# Altium PCB Player.PcbDoc (part 2 of 6)
Units mil, origin at the board's own origin, x right, y up, seen from the top; angles counter-clockwise.
Board outline 2992.13 x 3937.01 mil, 6 copper layers (Top Layer, Mid-Layer 1, Mid-Layer 2, Mid-Layer 3, Mid-Layer 4, Bottom Layer), stack 60.567 mil thick; 284 components, 323 nets, 1590 pads, 1045 vias.
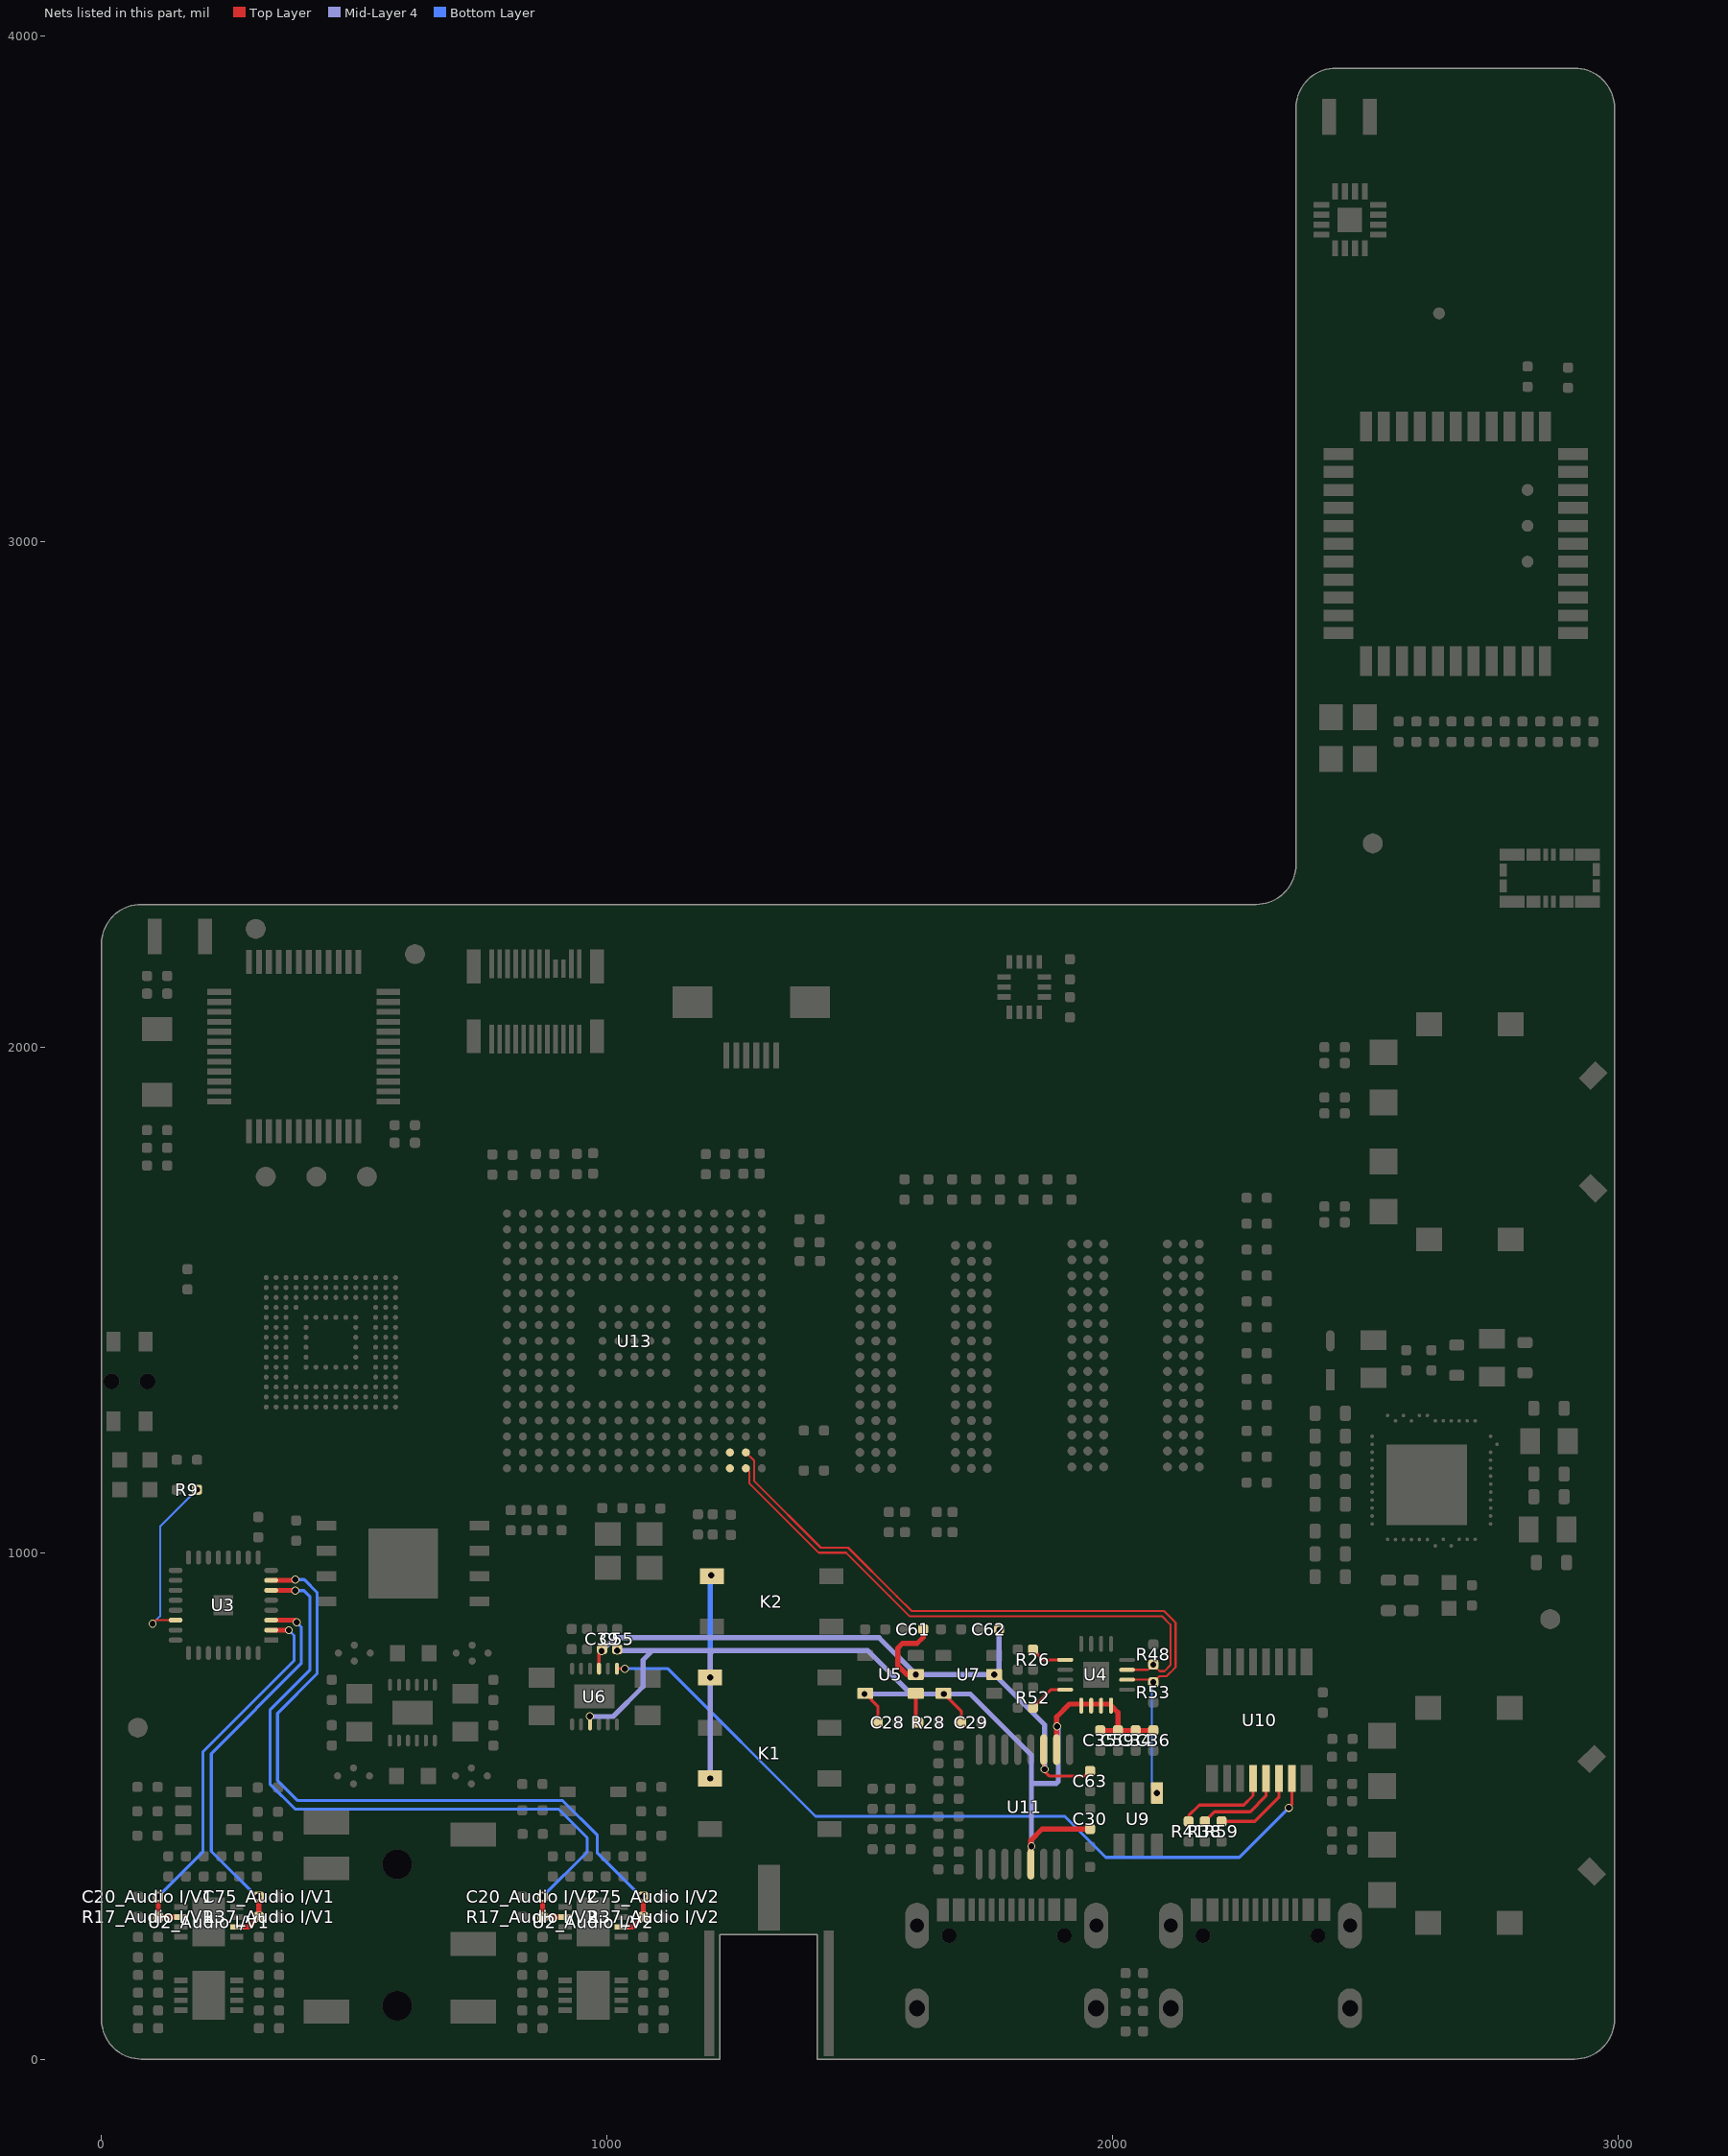
[diagram p6: the nets of this part, all layers, seen from the top]

## Footprints (in the part's own frame and the unit in brackets; to place one, negate y for a bottom-side part, rotate by r counter-clockwise, add the part's x,y. Pads: shape width x height; smd on the part's side, far side on the other; paste and mask are expansions set on the pad) (continued)
FP-RSL0048A-MFG [mm]
  round 0.18 smd paste+0 mask+0: 1(-2.975,2.2) 2(-2.985,1.8) 3(-2.985,1.4) 4(-2.985,1) 5(-2.985,0.6) 6(-2.985,0.2) 7(-3.3,-0.2) 8(-2.975,-0.6) 9(-3.3,-1) 10(-2.975,-1.4) 11(-2.975,-1.8) 12(-2.975,-2.2) 13(-2.2,-2.975) 14(-1.8,-2.975) 15(-1.4,-2.985) 16(-1,-2.975) 17(-0.6,-2.985) 18(-0.2,-2.985) 19(0.2,-2.975) 20(0.6,-2.975) 21(1,-2.975) 22(1.4,-2.975) 23(1.8,-3.3) 24(2.2,-2.975) 25(2.975,-2.2) 26(2.975,-1.8) 27(2.975,-1.4) 28(2.975,-1) 29(2.985,-0.6) 30(2.975,-0.2) 31(3.25,0.2) 32(3.25,0.6) 33(2.975,1) 34(3.25,1.4) 35(2.975,1.8) 36(3.25,2.2) 37(2.2,2.975) 38(1.8,2.975) 39(1.4,2.975) 40(1,2.975) 41(0.6,2.975) 42(0.2,2.975) 43(-0.2,2.975) 44(-0.6,2.975) 45(-1,2.975) 46(-1.4,2.975) 47(-1.8,2.975) 48(-2.2,2.975)
  rect 4.05x4.05 smd paste-1000 mask+0: 49(-0.225,0.225)
  Top Layer region: 3.4,-0.3 2.65,-0.3 2.612,-0.292 2.579,-0.271 2.558,-0.238 2.55,-0.2 2.55,-0.2 2.558,-0.162 2.579,-0.129 2.612,-0.108 2.65,-0.1 2.65,-0.1 3.4,-0.1
  Top Layer region: 0.7,3.4 0.7,2.65 0.687,2.6 0.65,2.563 0.6,2.55 0.6,2.55 0.562,2.558 0.529,2.579 0.508,2.612 0.5,2.65 0.5,2.65 0.5,3.4
  Top Layer region: -3.4,1.1 -2.65,1.1 -2.612,1.092 -2.579,1.071 -2.558,1.038 -2.55,1 -2.55,1 -2.563,0.95 -2.6,0.913 -2.65,0.9 -2.65,0.9 -3.4,0.9
  Top Layer region: -3.4,0.7 -2.65,0.7 -2.612,0.692 -2.579,0.671 -2.558,0.638 -2.55,0.6 -2.55,0.6 -2.563,0.55 -2.6,0.513 -2.65,0.5 -2.65,0.5 -3.4,0.5
  Top Layer region: -3.4,0.3 -2.65,0.3 -2.612,0.292 -2.579,0.271 -2.558,0.238 -2.55,0.2 -2.55,0.2 -2.563,0.15 -2.6,0.113 -2.65,0.1 -2.65,0.1 -3.4,0.1
  Top Layer region: -3.4,-1.7 -2.65,-1.7 -2.612,-1.708 -2.579,-1.729 -2.558,-1.762 -2.55,-1.8 -2.55,-1.8 -2.563,-1.85 -2.6,-1.887 -2.65,-1.9 -2.65,-1.9 -3.4,-1.9
  Top Layer region: -3.4,-1.3 -2.65,-1.3 -2.612,-1.308 -2.579,-1.329 -2.558,-1.362 -2.55,-1.4 -2.55,-1.4 -2.563,-1.45 -2.6,-1.487 -2.65,-1.5 -2.65,-1.5 -3.4,-1.5
  Top Layer region: -3.4,-2.1 -2.65,-2.1 -2.612,-2.108 -2.579,-2.129 -2.558,-2.162 -2.55,-2.2 -2.55,-2.2 -2.563,-2.25 -2.6,-2.287 -2.65,-2.3 -2.65,-2.3 -3.4,-2.3
  Top Layer region: -2.1,3.4 -2.1,2.65 -2.113,2.6 -2.15,2.563 -2.2,2.55 -2.2,2.55 -2.238,2.558 -2.271,2.579 -2.292,2.612 -2.3,2.65 -2.3,2.65 -2.3,3.4
  Top Layer region: -1.7,3.4 -1.7,2.65 -1.708,2.612 -1.729,2.579 -1.762,2.558 -1.8,2.55 -1.8,2.55 -1.838,2.558 -1.871,2.579 -1.892,2.612 -1.9,2.65 -1.9,2.65 -1.9,3.4
  Top Layer region: -1.3,3.4 -1.3,2.65 -1.313,2.6 -1.35,2.563 -1.4,2.55 -1.4,2.55 -1.438,2.558 -1.471,2.579 -1.492,2.612 -1.5,2.65 -1.5,2.65 -1.5,3.4
  Top Layer region: -0.9,3.4 -0.9,2.65 -0.913,2.6 -0.95,2.563 -1,2.55 -1,2.55 -1.038,2.558 -1.071,2.579 -1.092,2.612 -1.1,2.65 -1.1,2.65 -1.1,3.4
  Top Layer region: -0.5,3.4 -0.5,2.65 -0.513,2.6 -0.55,2.563 -0.6,2.55 -0.6,2.55 -0.638,2.558 -0.671,2.579 -0.692,2.612 -0.7,2.65 -0.7,2.65 -0.7,3.4
  Top Layer region: -0.1,3.4 -0.1,2.65 -0.113,2.6 -0.15,2.563 -0.2,2.55 -0.2,2.55 -0.238,2.558 -0.271,2.579 -0.292,2.612 -0.3,2.65 -0.3,2.65 -0.3,3.4
  Top Layer region: 1.1,3.4 1.1,2.65 1.087,2.6 1.05,2.563 1,2.55 1,2.55 0.962,2.558 0.929,2.579 0.908,2.612 0.9,2.65 0.9,2.65 0.9,3.4
  Top Layer region: 1.9,3.4 1.9,2.65 1.892,2.612 1.871,2.579 1.838,2.558 1.8,2.55 1.8,2.55 1.762,2.558 1.729,2.579 1.708,2.612 1.7,2.65 1.7,2.65 1.7,3.4
  Top Layer region: 2.3,3.4 2.3,2.65 2.287,2.6 2.25,2.563 2.2,2.55 2.2,2.55 2.162,2.558 2.129,2.579 2.108,2.612 2.1,2.65 2.1,2.65 2.1,3.4
  Top Layer region: 3.4,2.1 2.65,2.1 2.612,2.108 2.579,2.129 2.558,2.162 2.55,2.2 2.55,2.2 2.558,2.238 2.579,2.271 2.612,2.292 2.65,2.3 2.65,2.3 3.4,2.3
  Top Layer region: 3.4,1.7 2.65,1.7 2.612,1.708 2.579,1.729 2.558,1.762 2.55,1.8 2.55,1.8 2.558,1.838 2.579,1.871 2.612,1.892 2.65,1.9 2.65,1.9 3.4,1.9
  Top Layer region: 3.4,1.3 2.65,1.3 2.612,1.308 2.579,1.329 2.558,1.362 2.55,1.4 2.55,1.4 2.558,1.438 2.579,1.471 2.612,1.492 2.65,1.5 2.65,1.5 3.4,1.5
  Top Layer region: 3.4,0.9 2.65,0.9 2.612,0.908 2.579,0.929 2.558,0.962 2.55,1 2.55,1 2.558,1.038 2.579,1.071 2.612,1.092 2.65,1.1 2.65,1.1 3.4,1.1
  Top Layer region: 3.4,0.1 2.65,0.1 2.612,0.108 2.579,0.129 2.558,0.162 2.55,0.2 2.55,0.2 2.558,0.238 2.579,0.271 2.612,0.292 2.65,0.3 2.65,0.3 3.4,0.3
  Top Layer region: 3.4,-0.7 2.65,-0.7 2.612,-0.692 2.579,-0.671 2.558,-0.638 2.55,-0.6 2.55,-0.6 2.558,-0.562 2.579,-0.529 2.612,-0.508 2.65,-0.5 2.65,-0.5 3.4,-0.5
  Top Layer region: 3.4,-1.1 2.65,-1.1 2.612,-1.092 2.579,-1.071 2.558,-1.038 2.55,-1 2.55,-1 2.558,-0.962 2.579,-0.929 2.612,-0.908 2.65,-0.9 2.65,-0.9 3.4,-0.9
  Top Layer region: 3.4,-1.5 2.65,-1.5 2.612,-1.492 2.579,-1.471 2.558,-1.438 2.55,-1.4 2.55,-1.4 2.558,-1.362 2.579,-1.329 2.612,-1.308 2.65,-1.3 2.65,-1.3 3.4,-1.3
  Top Layer region: 3.4,-1.9 2.65,-1.9 2.612,-1.892 2.579,-1.871 2.558,-1.838 2.55,-1.8 2.55,-1.8 2.558,-1.762 2.579,-1.729 2.612,-1.708 2.65,-1.7 2.65,-1.7 3.4,-1.7
  Top Layer region: 3.4,-2.3 2.65,-2.3 2.612,-2.292 2.579,-2.271 2.558,-2.238 2.55,-2.2 2.55,-2.2 2.558,-2.162 2.579,-2.129 2.612,-2.108 2.65,-2.1 2.65,-2.1 3.4,-2.1
  Top Layer region: 2.1,-3.4 2.1,-2.65 2.108,-2.612 2.129,-2.579 2.162,-2.558 2.2,-2.55 2.2,-2.55 2.238,-2.558 2.271,-2.579 2.292,-2.612 2.3,-2.65 2.3,-2.65 2.3,-3.4
  Top Layer region: 1.7,-3.4 1.7,-2.65 1.708,-2.612 1.729,-2.579 1.762,-2.558 1.8,-2.55 1.8,-2.55 1.838,-2.558 1.871,-2.579 1.892,-2.612 1.9,-2.65 1.9,-2.65 1.9,-3.4
  Top Layer region: 0.5,-3.4 0.5,-2.65 0.508,-2.612 0.529,-2.579 0.562,-2.558 0.6,-2.55 0.6,-2.55 0.638,-2.558 0.671,-2.579 0.692,-2.612 0.7,-2.65 0.7,-2.65 0.7,-3.4
  Top Layer region: 0.1,-3.4 0.1,-2.65 0.108,-2.612 0.129,-2.579 0.162,-2.558 0.2,-2.55 0.2,-2.55 0.238,-2.558 0.271,-2.579 0.292,-2.612 0.3,-2.65 0.3,-2.65 0.3,-3.4
  Top Layer region: -0.3,-3.4 -0.3,-2.65 -0.292,-2.612 -0.271,-2.579 -0.238,-2.558 -0.2,-2.55 -0.2,-2.55 -0.162,-2.558 -0.129,-2.579 -0.108,-2.612 -0.1,-2.65 -0.1,-2.65 -0.1,-3.4
  Top Layer region: -0.7,-3.4 -0.7,-2.65 -0.692,-2.612 -0.671,-2.579 -0.638,-2.558 -0.6,-2.55 -0.6,-2.55 -0.562,-2.558 -0.529,-2.579 -0.508,-2.612 -0.5,-2.65 -0.5,-2.65 -0.5,-3.4
  Top Layer region: -1.1,-3.4 -1.1,-2.65 -1.092,-2.612 -1.071,-2.579 -1.038,-2.558 -1,-2.55 -1,-2.55 -0.962,-2.558 -0.929,-2.579 -0.908,-2.612 -0.9,-2.65 -0.9,-2.65 -0.9,-3.4
  Top Layer region: -1.5,-3.4 -1.5,-2.65 -1.492,-2.612 -1.471,-2.579 -1.438,-2.558 -1.4,-2.55 -1.4,-2.55 -1.362,-2.558 -1.329,-2.579 -1.308,-2.612 -1.3,-2.65 -1.3,-2.65 -1.3,-3.4
  Top Layer region: -1.9,-3.4 -1.9,-2.65 -1.892,-2.612 -1.871,-2.579 -1.838,-2.558 -1.8,-2.55 -1.8,-2.55 -1.762,-2.558 -1.729,-2.579 -1.708,-2.612 -1.7,-2.65 -1.7,-2.65 -1.7,-3.4
  Top Layer region: -2.3,-3.4 -2.3,-2.65 -2.292,-2.612 -2.271,-2.579 -2.238,-2.558 -2.2,-2.55 -2.2,-2.55 -2.162,-2.558 -2.129,-2.579 -2.108,-2.612 -2.1,-2.65 -2.1,-2.65 -2.1,-3.4
  Top Layer region: -3.4,-0.9 -2.65,-0.9 -2.612,-0.908 -2.579,-0.929 -2.558,-0.962 -2.55,-1 -2.55,-1 -2.558,-1.038 -2.579,-1.071 -2.612,-1.092 -2.65,-1.1 -2.65,-1.1 -3.4,-1.1
  Top Layer region: -3.4,1.5 -2.65,1.5 -2.612,1.492 -2.579,1.471 -2.558,1.438 -2.55,1.4 -2.55,1.4 -2.563,1.35 -2.6,1.313 -2.65,1.3 -2.65,1.3 -3.4,1.3
  Top Layer region: -3.4,2.3 -2.65,2.3 -2.612,2.292 -2.579,2.271 -2.558,2.238 -2.55,2.2 -2.55,2.2 -2.563,2.15 -2.6,2.113 -2.65,2.1 -2.65,2.1 -3.4,2.1
  Top Layer region: 0.3,3.4 0.3,2.65 0.287,2.6 0.25,2.563 0.2,2.55 0.2,2.55 0.162,2.558 0.129,2.579 0.108,2.612 0.1,2.65 0.1,2.65 0.1,3.4
  Top Layer region: 1.5,3.4 1.5,2.65 1.487,2.6 1.45,2.563 1.4,2.55 1.4,2.55 1.362,2.558 1.329,2.579 1.308,2.612 1.3,2.65 1.3,2.65 1.3,3.4
  Top Layer region: -3.4,1.9 -2.65,1.9 -2.612,1.892 -2.579,1.871 -2.558,1.838 -2.55,1.8 -2.55,1.8 -2.563,1.75 -2.6,1.713 -2.65,1.7 -2.65,1.7 -3.4,1.7
  Top Layer region: -3.4,-0.1 -2.65,-0.1 -2.612,-0.108 -2.579,-0.129 -2.558,-0.162 -2.55,-0.2 -2.55,-0.2 -2.563,-0.25 -2.6,-0.287 -2.65,-0.3 -2.65,-0.3 -3.4,-0.3
  Top Layer region: -3.4,-0.5 -2.65,-0.5 -2.612,-0.508 -2.579,-0.529 -2.558,-0.562 -2.55,-0.6 -2.55,-0.6 -2.563,-0.65 -2.6,-0.687 -2.65,-0.7 -2.65,-0.7 -3.4,-0.7
  Top Layer region: 3.4,0.5 2.65,0.5 2.612,0.508 2.579,0.529 2.558,0.562 2.55,0.6 2.55,0.6 2.558,0.638 2.579,0.671 2.612,0.692 2.65,0.7 2.65,0.7 3.4,0.7
  Top Layer region: 0.9,-3.4 0.9,-2.65 0.908,-2.612 0.929,-2.579 0.962,-2.558 1,-2.55 1,-2.55 1.038,-2.558 1.071,-2.579 1.092,-2.612 1.1,-2.65 1.1,-2.65 1.1,-3.4
  Top Layer region: 1.3,-3.4 1.3,-2.65 1.308,-2.612 1.329,-2.579 1.362,-2.558 1.4,-2.55 1.4,-2.55 1.438,-2.558 1.471,-2.579 1.492,-2.612 1.5,-2.65 1.5,-2.65 1.5,-3.4
  silkscreen extent -4.1,-3.07 3.08,3.08, body extent -3.5,-3.5 3.5,3.5, height 0.25
FP-SOD-323-IPC_C [mil]
  rect 41.54x17.16 smd paste+0 mask+0: 1(-38.41,0)
  rrect100% 41.54x17.16 smd paste+0 mask+0: 2(38.41,0)
  silkscreen extent -57,-26 33,33, body extent -63,-29 63,29, height 10
FP-SOT403-1-MFG [mm]
  rect 1.35x0.6 smd paste-1000 mask+0: 1(-2.925,2.375) 8(-2.925,-2.375) 9(2.925,-2.375) 16(2.925,2.375)
  rect 1.35x0.4 smd paste-1000 mask+0: 2(-2.925,1.625) 3(-2.925,0.975) 4(-2.925,0.325) 5(-2.925,-0.325) 6(-2.925,-0.975) 7(-2.925,-1.625) 10(2.925,-1.625) 11(2.925,-0.975) 12(2.925,-0.325) 13(2.925,0.325) 14(2.925,0.975) 15(2.925,1.625)
  silkscreen extent -4.3,-2.55 1.88,2.55, body extent -3.73,-2.9 3.72,2.9, height 0.25
FP-T1633-4-MFG [mm]
  rect 0.8x0.3 smd paste+0 mask+0: 1(-1.425,0.75) 2(-1.425,0.25) 3(-1.425,-0.25) 4(-1.425,-0.75) 9(1.425,-0.75) 10(1.425,-0.25) 11(1.425,0.25) 12(1.425,0.75)
  rect 0.3x0.8 smd paste+0 mask+0: 5(-0.75,-1.425) 6(-0.25,-1.425) 7(0.25,-1.425) 8(0.75,-1.425) 13(0.75,1.425) 14(0.25,1.425) 15(-0.25,1.425) 16(-0.75,1.425)
  rect 1.23x1.23 smd paste+0 mask+0: 17(0,0)
  silkscreen extent -2.52,-1.58 1.58,1.58, body extent -1.92,-1.92 1.93,1.92, height 0.25
FP-TFBGA240+25-A07U-MFG [mil]
  round 16 smd: A1(-251.97,251.97) A2(-220.47,251.97) A3(-188.98,251.97) A4(-157.48,251.97) A5(-125.98,251.97) A6(-94.49,251.97) A7(-62.99,251.97) A8(-31.5,251.97) A9(0,251.97) A10(31.5,251.97) A11(62.99,251.97) A12(94.49,251.97) A13(125.98,251.97) A14(157.48,251.97) A15(188.98,251.97) A16(220.47,251.97) A17(251.97,251.97) B1(-251.97,220.47) B2(-220.47,220.47) B3(-188.98,220.47) B4(-157.48,220.47) B5(-125.98,220.47) B6(-94.49,220.47) B7(-62.99,220.47) B8(-31.5,220.47) B9(0,220.47) B10(31.5,220.47) B11(62.99,220.47) B12(94.49,220.47) B13(125.98,220.47) B14(157.48,220.47) B15(188.98,220.47) B16(220.47,220.47) B17(251.97,220.47) C1(-251.97,188.98) C2(-220.47,188.98) C3(-188.98,188.98) C4(-157.48,188.98) C5(-125.98,188.98) C6(-94.49,188.98) C7(-62.99,188.98) C8(-31.5,188.98) C9(0,188.98) C10(31.5,188.98) C11(62.99,188.98) C12(94.49,188.98) C13(125.98,188.98) C14(157.48,188.98) C15(188.98,188.98) C16(220.47,188.98) C17(251.97,188.98) D1(-251.97,157.48) D2(-220.47,157.48) D3(-188.98,157.48) D4(-157.48,157.48) D5(-125.98,157.48) D6(-94.49,157.48) D7(-62.99,157.48) D8(-31.5,157.48) D9(0,157.48) D10(31.5,157.48) D11(62.99,157.48) D12(94.49,157.48) D13(125.98,157.48) D14(157.48,157.48) D15(188.98,157.48) D16(220.47,157.48) D17(251.97,157.48) E1(-251.97,125.98) E2(-220.47,125.98) E3(-188.98,125.98) E4(-157.48,125.98) E5(-125.98,125.98) E6(-94.49,125.98) E7(-62.99,125.98) E8(-31.5,125.98) E9(0,125.98) E10(31.5,125.98) E11(62.99,125.98) E12(94.49,125.98) E13(125.98,125.98) E14(157.48,125.98) E15(188.98,125.98) E16(220.47,125.98) E17(251.97,125.98) F1(-251.97,94.49) F2(-220.47,94.49) F3(-188.98,94.49) F4(-157.48,94.49) F5(-125.98,94.49) F13(125.98,94.49) F14(157.48,94.49) F15(188.98,94.49) F16(220.47,94.49) F17(251.97,94.49) G1(-251.97,62.99) G2(-220.47,62.99) G3(-188.98,62.99) G4(-157.48,62.99) G5(-125.98,62.99) G7(-62.99,62.99) G8(-31.5,62.99) G9(0,62.99) G10(31.5,62.99) G11(62.99,62.99) G13(125.98,62.99) G14(157.48,62.99) G15(188.98,62.99) G16(220.47,62.99) G17(251.97,62.99) H1(-251.97,31.5) H2(-220.47,31.5) H3(-188.98,31.5) H4(-157.48,31.5) H5(-125.98,31.5) H7(-62.99,31.5) H8(-31.5,31.5) H9(0,31.5) H10(31.5,31.5) H11(62.99,31.5) H13(125.98,31.5) H14(157.48,31.5) H15(188.98,31.5) H16(220.47,31.5) H17(251.97,31.5) J1(-251.97,0) J2(-220.47,0) J3(-188.98,0) J4(-157.48,0) J5(-125.98,0) J7(-62.99,0) J8(-31.5,0) J9(0,0) J10(31.5,0) J11(62.99,0) J13(125.98,0) J14(157.48,0) J15(188.98,0) J16(220.47,0) J17(251.97,0) K1(-251.97,-31.5) K2(-220.47,-31.5) K3(-188.98,-31.5) K4(-157.48,-31.5) K5(-125.98,-31.5) K7(-62.99,-31.5) K8(-31.5,-31.5) K9(0,-31.5) K10(31.5,-31.5) K11(62.99,-31.5) K13(125.98,-31.5) K14(157.48,-31.5) K15(188.98,-31.5) K16(220.47,-31.5) K17(251.97,-31.5) L1(-251.97,-62.99) L2(-220.47,-62.99) L3(-188.98,-62.99) L4(-157.48,-62.99) L5(-125.98,-62.99) L7(-62.99,-62.99) L8(-31.5,-62.99) L9(0,-62.99) L10(31.5,-62.99) L11(62.99,-62.99) L13(125.98,-62.99) L14(157.48,-62.99) L15(188.98,-62.99) L16(220.47,-62.99) L17(251.97,-62.99) M1(-251.97,-94.49) M2(-220.47,-94.49) M3(-188.98,-94.49) M4(-157.48,-94.49) M5(-125.98,-94.49) M13(125.98,-94.49) M14(157.48,-94.49) M15(188.98,-94.49) M16(220.47,-94.49) M17(251.97,-94.49) N1(-251.97,-125.98) N2(-220.47,-125.98) N3(-188.98,-125.98) N4(-157.48,-125.98) N5(-125.98,-125.98) N6(-94.49,-125.98) N7(-62.99,-125.98) N8(-31.5,-125.98) N9(0,-125.98) N10(31.5,-125.98) N11(62.99,-125.98) N12(94.49,-125.98) N13(125.98,-125.98) N14(157.48,-125.98) N15(188.98,-125.98) N16(220.47,-125.98) N17(251.97,-125.98) P1(-251.97,-157.48) P2(-220.47,-157.48) P3(-188.98,-157.48) P4(-157.48,-157.48) P5(-125.98,-157.48) P6(-94.49,-157.48) P7(-62.99,-157.48) P8(-31.5,-157.48) P9(0,-157.48) P10(31.5,-157.48) P11(62.99,-157.48) P12(94.49,-157.48) P13(125.98,-157.48) P14(157.48,-157.48) P15(188.98,-157.48) P16(220.47,-157.48) P17(251.97,-157.48) R1(-251.97,-188.98) R2(-220.47,-188.98) R3(-188.98,-188.98) R4(-157.48,-188.98) R5(-125.98,-188.98) R6(-94.49,-188.98) R7(-62.99,-188.98) R8(-31.5,-188.98) R9(0,-188.98) R10(31.5,-188.98) R11(62.99,-188.98) R12(94.49,-188.98) R13(125.98,-188.98) R14(157.48,-188.98) R15(188.98,-188.98) R16(220.47,-188.98) R17(251.97,-188.98) T1(-251.97,-220.47) T2(-220.47,-220.47) T3(-188.98,-220.47) T4(-157.48,-220.47) T5(-125.98,-220.47) T6(-94.49,-220.47) T7(-62.99,-220.47) T8(-31.5,-220.47) T9(0,-220.47) T10(31.5,-220.47) T11(62.99,-220.47) T12(94.49,-220.47) T13(125.98,-220.47) T14(157.48,-220.47) T15(188.98,-220.47) T16(220.47,-220.47) T17(251.97,-220.47) U1(-251.97,-251.97) U2(-220.47,-251.97) U3(-188.98,-251.97) U4(-157.48,-251.97) U5(-125.98,-251.97) U6(-94.49,-251.97) U7(-62.99,-251.97) U8(-31.5,-251.97) U9(0,-251.97) U10(31.5,-251.97) U11(62.99,-251.97) U12(94.49,-251.97) U13(125.98,-251.97) U14(157.48,-251.97) U15(188.98,-251.97) U16(220.47,-251.97) U17(251.97,-251.97)
  silkscreen extent -298,-279 279,279, body extent -298,-298 298,298, height 10
FPC-SMD_P0.50-6P_AFC01-S06FCA-00 [mm]
  rect 0.3x1.3 smd: 1(-1.248,1.339) 2(-0.748,1.339) 3(-0.248,1.339) 4(0.252,1.339) 5(0.752,1.339) 6(1.252,1.339)
  rect 2x1.6 smd: 7(-2.95,-1.339) 8(2.95,-1.339)
  silkscreen extent -3.72,-4.36 3.7,1.75, body extent -3.7,-4.49 3.7,1.61, height 2.01
L0603 [mil]
  rect 29.5x32 smd: 1(-31.5,0) 2(31.5,0)
  silkscreen extent -55,-25 55,25, body extent -31,-15 32,16, height 16
L0805 [mm] "0805贴片叠层电感"
  rect 1x1.3 smd: 1(-0.95,0) 2(0.95,0)
  silkscreen extent -1.7,-0.89 1.7,0.89, body extent -1,-0.65 1,0.65, height 1.3
LED0603_B [mil] "蓝色0603LED"
  rect 30x30 smd: 1(-30,0) 2(30,0)
  silkscreen extent -53,-23 61,23, body extent -31,-16 32,16, height 18
LGA-14_L3.0-W2.5-P0.50-TL [mm]
  rect 0.675x0.28 smd: 1(-1.262,0.75) 2(-1.262,0.25) 3(-1.262,-0.25) 4(-1.262,-0.75) 8(1.262,-0.75) 9(1.262,-0.25) 10(1.262,0.25) 11(1.262,0.75)
  rect 0.28x0.675 smd: 5(-0.5,-1.012) 6(0,-1.012) 7(0.5,-1.012) 12(0.5,1.012) 13(0,1.012) 14(-0.5,1.012)
  silkscreen extent -1.98,-1.33 1.58,1.33, body extent -1.5,-1.25 1.5,1.25, height 0.92
"Mark 1" [mm] "光学定位点，直径1mm"
  round 1 smd paste-1 mask+0.7: Mark(0,0)
  Keep-Out Layer circle w0.1: c0,0 r1.5
OK-06F024-04 [mm]
  rect 0.23x1.45 smd: 1(-2.224,-1.876) 2(-1.824,-1.876) 3(-1.424,-1.876) 4(-1.024,-1.876) 5(-0.624,-1.876) 6(-0.224,-1.876) 7(0.176,-1.876) 8(0.576,-1.876) 9(0.976,-1.876) 10(1.376,-1.876) 11(1.776,-1.876) 12(2.176,-1.876) 13(2.176,1.912) 14(1.776,1.912) 17(0.576,1.912) 18(0.176,1.912) 19(-0.224,1.912) 20(-0.624,1.912) 21(-1.024,1.912) 22(-1.424,1.912) 23(-1.824,1.912) 24(-2.224,1.912)
  rect 0.23x0.92 smd: 15(1.376,1.658) 16(0.976,1.658)
  rect 0.7x1.7 smd: 25(-3.124,-1.736) 26(3.076,-1.736) 27(3.076,1.772) 28(-3.124,1.772)
  silkscreen extent -3.67,-2.88 3.62,2.32, body extent -3.51,-1.48 3.51,1.48, height 0.98
PJ342A [mm] "沉板式，有头"
  round 1.5 hole 1.5: 0(0,-4.4) 0(0,-11.5)
  rect 2.3x1.2 smd: 1(-3.81,-4.1) 2(3.556,-4.1) 3(-3.81,-7.5) 4(3.556,-11.3) 5(-3.81,-13) 6(3.556,-13.6)
  silkscreen extent -3.3,-14.22 3.3,0, body extent -4.2,-14.15 4.1,-0.05, height 4.75
"QFN32 5x5_L" [mm] "32脚，长x宽x高：5x5x0.95mm，脚距：0.5mm"
  rect 0.25x0.7 smd: 1(-1.751,-2.4)
  oval 0.25x0.7 smd: 2(-1.25,-2.4) 3(-0.75,-2.4) 4(-0.25,-2.4) 5(0.25,-2.4) 6(0.75,-2.4) 7(1.25,-2.4) 8(1.75,-2.4) 17(1.75,2.4) 18(1.25,2.4) 19(0.75,2.4) 20(0.25,2.4) 21(-0.25,2.4) 22(-0.75,2.4) 23(-1.25,2.4) 24(-1.75,2.4)
  oval 0.7x0.25 smd: 9(2.4,-1.75) 10(2.4,-1.25) 11(2.4,-0.75) 12(2.4,-0.25) 13(2.4,0.25) 14(2.4,0.75) 15(2.4,1.25) 16(2.4,1.75) 25(-2.4,1.75) 26(-2.4,1.25) 27(-2.4,0.75) 28(-2.4,0.25) 29(-2.4,-0.25) 30(-2.4,-0.75) 31(-2.4,-1.25) 32(-2.4,-1.75)
  rect 1x1 smd: 33(0,0)
  Top Layer region: -1.75,1.75 1.75,1.75 1.75,-1.75 -1.25,-1.75 -1.75,-1.25
  silkscreen extent -2.6,-3.13 2.6,2.6, body extent -2.5,-2.5 2.5,2.5, height 1.01
QFN-44_L12.0-W12.0-P0.90-TL [mm]
  rect 1.5x0.6 smd paste+0 mask+0.05: 1(-5.889,4.496) 2(-5.889,3.607) 3(-5.889,2.692) 4(-5.889,1.803) 5(-5.889,0.889) 6(-5.889,0) 7(-5.889,-0.889) 8(-5.889,-1.803) 9(-5.889,-2.692) 10(-5.889,-3.607) 11(-5.889,-4.496) 23(5.889,-4.496) 24(5.889,-3.607) 25(5.889,-2.692) 26(5.889,-1.803) 27(5.889,-0.889) 28(5.889,0) 29(5.889,0.889) 30(5.889,1.803) 31(5.889,2.692) 32(5.889,3.607) 33(5.889,4.496)
  rect 0.6x1.5 smd paste+0 mask+0.05: 12(-4.496,-5.889) 13(-3.607,-5.889) 14(-2.692,-5.889) 15(-1.803,-5.889) 16(-0.889,-5.889) 17(0,-5.889) 18(0.889,-5.889) 19(1.803,-5.889) 20(2.692,-5.889) 21(3.607,-5.889) 22(4.496,-5.889) 34(4.496,5.889) 35(3.607,5.889) 36(2.692,5.889) 37(1.803,5.889) 38(0.889,5.889) 39(0,5.889) 40(-0.889,5.889) 41(-1.803,5.889) 42(-2.692,5.889) 43(-3.607,5.889) 44(-4.496,5.889)
  round 0.6 smd paste+0 mask+0.05: 45(-2.7,3.607) 46(-0.9,3.607) 47(0.9,3.607)
  silkscreen extent -5.99,-5.99 5.99,5.99, body extent -6.01,-6.01 6.01,6.01, height 1.5
SMD_L2.2-W1.0_KH-221020-TP [mm]
  rect 1.8x0.7 smd paste+0 mask+0.05: 1(0,0)
  silkscreen extent -1.3,-0.5 1.2,0.51, body extent -1.1,-0.51 1.1,0.5, height 1.91
SW-SMD-3.5*3.0_4P [mm]
  round 0.8 hole 0.8 unplated mask+0: 0(0,0.9) 0(0,-0.9)
  rect 1x0.7 smd mask+0.051: 1(-2,0.8) 2(-2,-0.8) 3(2,-0.8) 4(2,0.8)
  silkscreen extent -1.75,-1.5 1.75,2.25, body extent -2.3,-1.51 2.3,2.24, height 1.33
SW-SMD_SIQ-02FVS3_1 [mm]
  rect 1.2x1.3 smd paste+0 mask+0.05: 1(5.4,-2.964) 2(5.4,1.136) 5(-5.4,1.136) 6(-5.4,-2.964)
  rect 0.85x1.2 smd rot 135 paste+0 mask+0.05: 3(2.828,5.264)
  rect 0.85x1.2 smd rot 45 paste+0 mask+0.05: 4(-2.828,5.264)
  rect 1.3x1.4 smd paste+0 mask+0.05: A(-4,-5.264) B(4,-5.264) C(1.475,-5.264) S(-1.475,-5.264)
  Keep-Out Layer board cut-out: 3.8,-2.064 3.8,-1.959 3.745,-1.755 3.64,-1.573 3.491,-1.424 3.309,-1.319 3.105,-1.264 2.895,-1.264 2.691,-1.319 2.509,-1.424 2.36,-1.573 2.254,-1.755 2.2,-1.959 2.2,-2.064 2.2,-2.17 2.254,-2.373 2.36,-2.555 2.509,-2.704 2.691,-2.81 2.895,-2.864 3.105,-2.864 3.309,-2.81 3.491,-2.704 3.64,-2.555 3.745,-2.373 3.8,-2.17 3.8,-2.064 3.8,-2.064
  Keep-Out Layer board cut-out: -2.2,-2.064 -2.2,-1.959 -2.255,-1.755 -2.36,-1.573 -2.509,-1.424 -2.691,-1.319 -2.895,-1.264 -3.105,-1.264 -3.309,-1.319 -3.491,-1.424 -3.64,-1.573 -3.746,-1.755 -3.8,-1.959 -3.8,-2.064 -3.8,-2.17 -3.746,-2.373 -3.64,-2.555 -3.491,-2.704 -3.309,-2.81 -3.105,-2.864 -2.895,-2.864 -2.691,-2.81 -2.509,-2.704 -2.36,-2.555 -2.255,-2.373 -2.2,-2.17 -2.2,-2.064 -2.2,-2.064
  Keep-Out Layer circle w0.025: c3,-2.064 r0.8
  Keep-Out Layer circle w0.254: c3,-2.064 r0.8
  Keep-Out Layer circle w0.025: c-3,-2.064 r0.8
  Keep-Out Layer circle w0.254: c-3,-2.064 r0.8
  silkscreen extent -7.25,-4.76 7.25,9.69, body extent -7.18,-5.15 7.21,9.64, height 4
"TEST 1" [mm] "测试点1mm"
  round 1 smd paste-1: 1(0,0)
USB-C-SMD_16P [mm] "封装库来自淘宝ID:黄晶宝石"
  oval 1.2x2.3 hole 0.7 slot 1.8 at 90 deg: 0(-4.5,-1.675) 0(4.5,-1.675)
  oval 1.2x2 hole 0.8 slot 1.6 at 90 deg: 0(-4.5,2.475) 0(4.5,2.475)
  rect 0.3x1.15 smd: A1(3.35,-2.473) A4(2.55,-2.471) A5(1.25,-2.475) A6(0.25,-2.475) A7(-0.25,-2.473) A9(-2.55,-2.475) A12(-3.35,-2.475) B1(-3.05,-2.475) B4(-2.25,-2.475) B5(-1.75,-2.475) B6(-0.75,-2.475) B7(0.75,-2.473) B9(2.25,-2.471) B12(3.05,-2.473)
  rect 0.3x1.148 smd: A8(1.75,-2.475) B8(-1.25,-2.475)
  round 0.75 hole 0.75 unplated: ""(-2.89,-1.175) ""(2.89,-1.175)
  silkscreen extent -4.56,-2.75 4.5,5.08, body extent -4.45,-2.87 4.49,5.03, height 3.25
WIFI-ANT [mm] "淘宝ID:黄晶宝石"
  round 0.6 smd: 1(0,0)
  Top Layer lines w0.6: 0,0 0,-7.8 1.2,-7.8 1.2,-4 2.4,-4 2.4,-7.8 3.6,-7.8 3.6,-4 4.8,-4 4.8,-7.8 6,-7.8 6,-4 7.2,-4 7.2,-7.8 11,-7.8 ; 0,-2.4 7.3,-2.4
WSON8 [mm]
  rect 3.5x3.5 smd: 0(0,0)
  rect 1x0.5 smd: 1(-3.845,1.905) 2(-3.845,0.635) 3(-3.845,-0.635) 4(-3.845,-1.905) 5(3.845,-1.905) 6(3.845,-0.635) 7(3.845,0.635) 8(3.845,1.905)
  silkscreen extent -4.18,-3.17 4.17,3.17, body extent -4.03,-3.03 4.02,3.03, height 0.8
XTAL-3215-2P [mm] "3.2*1.5*0.6mm(长宽高)"
  rect 1.2x1.5 smd: 1(-1.65,0) 2(1.65,0)
  silkscreen extent -2.41,-0.89 2.41,0.89, body extent -1.6,-0.75 1.6,0.75, height 0.61
XTAL-3225-4P [mm] "3.2*2.5*0.7mm(长宽高)                             淘宝ID:黄晶宝石"
  rect 1.3x1.2 smd: 1(-1.05,-0.85) 2(1.05,-0.85) 3(1.05,0.85) 4(-1.05,0.85)
  silkscreen extent -2.03,-1.75 1.91,1.65, body extent -1.6,-1.25 1.6,1.25, height 0.7

## Part data
ANT1: library part ANT1, "PCB板载天线", BOM名称=PCB板载天线, 当前库版本V2023.8.14 @淘宝卖家:黄晶宝石=最新版本发布https://item.taobao.com/item.htm?id=566775463719, 联系下单店铺卖家 免费技术支持="联系下单店铺卖家 免费帮你查找封装"
Audio: "3.5耳机插座,4Pin", BOM名称=耳机插座, 当前库版本V2023.8.14 @淘宝卖家:黄晶宝石=最新版本发布https://item.taobao.com/item.htm?id=566775463719
B1 B2: library part BEAD
"Battery Connector": library part BM25-4S/2-V-51, "Battery"
C1 "C1_HMI-Rotary Encoder1" "C1_HMI-Rotary Encoder2" C2 "C2_HMI-Rotary Encoder1" "C2_HMI-Rotary Encoder2" C3 "C3_HMI-Rotary Encoder1" "C3_HMI-Rotary Encoder2" C4 C5 C6 C7 C8 C9 C10 C11 C12 C13 C14 C15 C16 C16_U_SDRAM1 C16_U_SDRAM2 C17 C17_U_SDRAM1 C17_U_SDRAM2 C18 C18_U_SDRAM1 C18_U_SDRAM2 C19 C19_U_SDRAM1 C19_U_SDRAM2 "C20_Audio I/V1" "C20_Audio I/V2" C20_U_SDRAM1 C20_U_SDRAM2 C21 C21_U_SDRAM1 C21_U_SDRAM2 C22 C22_U_SDRAM1 C22_U_SDRAM2 C23 C23_U_SDRAM1 C23_U_SDRAM2 C24 C24_U_SDRAM1 C24_U_SDRAM2 C25 C25_U_SDRAM1 C25_U_SDRAM2 C26 C26_U_SDRAM1 C26_U_SDRAM2 C27 C27_U_SDRAM1 C27_U_SDRAM2 C28 C29 C30 C31 C33 C34 C35 C36 C37 C38 C39 "C40_Audio I/V1" "C40_Audio I/V2" C41 C42 C43 C44 C45 C46 C47 C48 C49 C50 C51 C52 "C53_Audio I/V1" "C53_Audio I/V2" C54 C55 C56 C57 C58 C59 C61 C62 C63 C64 C65 C66 C67 C68 C69 C70 C71 "C72_Audio I/V1" "C72_Audio I/V2" "C73_Audio I/V1" "C73_Audio I/V2" "C74_Audio I/V1" "C74_Audio I/V2" "C75_Audio I/V1" "C75_Audio I/V2" "C76_Audio I/V1" "C76_Audio I/V2" "C77_Audio I/V1" "C77_Audio I/V2" "C78_Audio I/V1" "C78_Audio I/V2" C79 C80 C81 C82 "C83_Audio I/V1" "C83_Audio I/V2" "C84_Audio I/V1" "C84_Audio I/V2" C95: library part 电容-0402, "Capacitor"
C32 C60: library part "CAP 240pF 250V C0G 0805", Manufacturer="Kyocera AVX", Manufacturer Part Number=600F241FT250XT, Package=0805, Supplier Part Number 1=581-600F241FT, Temperature Coefficient=C0G, Voltage Rating=250V, Supplier 1=Mouser
C86 C92 C93 C94: library part CMP-06053-000028-1, "CAP FEEDTHRU 1UF 20% 6.3V 0603", Capacitance=1uF, Case Code (Imperial)=0603, Case Code (Metric)=1608, Current=2A, DC Resistance (DCR)=30mR, Max Operating Temperature=125°C, Min Operating Temperature=-55°C, Package Quantity=4000, Tolerance=20%, Voltage Rating=6.3V, Case/Package=0603, Height=0.028inch, Length=0.063inch, Mount="Surface Mount", Packaging="Tape and Reel", Voltage Rating (DC)=6.3V, Width=0.031inch
D2: library part CMP-56206-000009-1, "DIODE SCHOTTKY 40V 1A SOD323", Average Rectified Current=1A, Forward Voltage=900mV, Max Operating Temperature=125°C, Max Reverse Leakage Current=1mA, Max Reverse Voltage (DC)=40V, Max Surge Current=10A, Min Operating Temperature=-65°C, Package Quantity=1, Element Configuration=Single, Lead Free="Lead Free", Mount="Surface Mount", Number of Pins=2, Packaging="Tape and Reel", Peak Non-Repetitive Surge Current=10A, Radiation Hardening=No, RoHS Compliant=Yes, Series=-
"Encode_HMI-Rotary Encoder1" "Encode_HMI-Rotary Encoder2": JLCPCB Part Class="Extended Part", LCSC Part Name=拨轮滚轮旋转编码器开关, Manufacturer=MITSUMI(美上美), Add into BOM=yes, Convert to PCB=yes, Datasheet=https://atta.szlcsc.com/upload/public/pdf/source/20220728/2FBC1A98A06DC86460FC69DAE20456FC.pdf, DEVICE=SIQ-02FVS3, Manufacturer Part=SIQ-02FVS3, Supplier=LCSC, Supplier Footprint=SMD, Supplier Part=C2925423, Symbol=SIQ-02FVS3
FPC2: JLCPCB Part Class=扩展库, LCSC Part Name="间距:0.5mm P数:6P 翻盖式 下接", Manufacturer=JS(钜硕电子), Add into BOM=yes, Contact Type=下接, Convert to PCB=yes, Datasheet=https://atta.szlcsc.com/upload/public/pdf/source/20190816/C413942_2A72D1AC756EAE17EEDF756A339D4500.pdf, DEVICE=AFC01-S06FCA-00, FFC, FCB Thickness=0.3mm, Height Above Board=2mm, Locking Feature=翻盖式, Manufacturer Part=AFC01-S06FCA-00, Mounting Type=卧贴, Number of Contacts=6P, Pitch=0.5mm, Supplier=LCSC, Supplier Footprint=SMD,P=0.5mm,卧贴, Supplier Part=C262655, Symbol=AFC01-S06FCA-00
J1: library part CMP-03913-103226999-1, "60612202111308 WR-MCX_MCX PCB End Launch Jack", Insulation Resistance=1GΩ, Max Operating Temperature=155°C, Min Operating Temperature=-55°C, Impedance=50Ω, Insertion Loss (dB)=0.25dB, Insulation Material=PTFE, NexarPartId=103226999, Packaging="Tape and Reel", RoHS=Compliant
K1: library part CMP-00287-06029784-1, "AQW212SX Mosfet Relay, Dpst-No, 0.4A, 60V, Sop-8 Rohs Compliant: Yes", Ambient Temperature Range High=85°C, Capacitance=800fF, Case/Package=SOP, Input Current=3mA, Isolation Voltage=1.5kV, Load Current=400mA, Max Junction Temperature (Tj)=125°C, Max Output Voltage=60V, Max Power Dissipation=650mW, Min Operating Temperature=-40°C, On-State Resistance=830mΩ, Output Voltage=48V, Resistance=2.5Ω, Height=2.3mm, Max Operating Temperature=85°C, Mount="Surface Mount", NexarPartId=6029784, Number of Contacts=2, Output Current=400mA, Packaging="Tape & Reel (TR)", Radiation Hardening=No, Relay Type=Relay, RoHS=Compliant, Termination="Gull Wing", Throw Configuration=DPST
K2: library part CMP-00287-00695292-1, "AQY212GSZ Relay Ssr 50MA 1.5V Dc-in 1A 60V Ac/dc-out 4-PIN Sop T/r", Ambient Temperature Range High=85°C, Capacitance=800fF, Case/Package=SOP, Forward Current=1.1mA, Input Current=30mA, Isolation Voltage=1.5kV, Load Current=1A, Max Input Current=50mA, Max Input Voltage=1.5V, Max Output Voltage=60V, Max Power Dissipation=450mW, Min Operating Temperature=-40°C, On-State Resistance=340mΩ, Output Voltage=48V, Resistance=700mΩ, Height=2.1mm, Lead Free="Lead Free", Length=4.4mm, Max Operating Temperature=85°C, Max Output Current=1A, Mount="Surface Mount", NexarPartId=695292, Number of Contacts=1, Number of Pins=4, Output Current=1A, Packaging="Tape & Reel (TR)", Radiation Hardening=No, REACH SVHC="No SVHC", Relay Type=Relay, RoHS=Compliant, Termination="Gull Wing", Throw Configuration=SPST, Width=4.3mm
L1 L2 L3 L4 L5 L6 L7 L8: library part L, "贴片小功率电感", BOM名称=小功率贴片电感, 联系下单店铺卖家 免费帮你查找封装="联系下单店铺卖家 免费技术支持"
LED1 LED2: library part LED-SMD, "贴片LED", BOM名称=贴片LED, 联系卖家 免费查找封装=封装库来自淘宝卖家ID：黄晶宝石
MR1 MR2 MR3 MR4: library part MARK, "光学定位点", BOM名称=光学定位点, 联系下单店铺卖家 免费技术支持="联系下单店铺卖家 免费帮你查找封装"
R1 R2 R3 R4 R5 R6 R7 R8 R9 R10 R11 R12 "R12_HMI-Rotary Encoder1" "R12_HMI-Rotary Encoder2" R13 "R13_HMI-Rotary Encoder1" "R13_HMI-Rotary Encoder2" R14 R15 "R15_HMI-Rotary Encoder1" "R15_HMI-Rotary Encoder2" R16 "R17_Audio I/V1" "R17_Audio I/V2" R18 "R19_Audio I/V1" "R19_Audio I/V2" "R20_Audio I/V1" "R20_Audio I/V2" R21 R22 R23 "R24_Audio I/V1" "R24_Audio I/V2" "R25_Audio I/V1" "R25_Audio I/V2" R26 "R27_Audio I/V1" "R27_Audio I/V2" R28 R29 R30 R31 R32 R33 "R34_Audio I/V1" "R34_Audio I/V2" R35 "R36_Audio I/V1" "R36_Audio I/V2" "R37_Audio I/V1" "R37_Audio I/V2" R38 R40 R41 R42 R43 R44 R45 R46 R47 R48 R49 R50 R51 R52 R53 R54 "R55_Audio I/V1" "R55_Audio I/V2" "R56_Audio I/V1" "R56_Audio I/V2" "R57_Audio I/V1" "R57_Audio I/V2" R59 "R60_Audio I/V1" "R60_Audio I/V2" "R61_Audio I/V1" "R61_Audio I/V2" "R63_Audio I/V1" "R63_Audio I/V2" "R65_Audio I/V1" "R65_Audio I/V2": library part R, "贴片电阻", BOM名称=贴片电阻
  R1 R2 R3 R4 R5 R6 R7 R8 R9 R10 R11 R12 R13 R14 R15 R16 R18 R21 R22 R23 R26 R28 R29 R30 R31 R32 R33 R35 R38 R40 R41 R42 R43 R44 R45 R46 R47 R48 R49 R50 R51 R52 R53 R54 R59: 联系卖家，免费查找封装=唯一出售店铺网址https://shop463601444.taobao.com
  "R12_HMI-Rotary Encoder1" "R12_HMI-Rotary Encoder2" "R13_HMI-Rotary Encoder1" "R13_HMI-Rotary Encoder2" "R15_HMI-Rotary Encoder1" "R15_HMI-Rotary Encoder2" "R17_Audio I/V1" "R17_Audio I/V2" "R19_Audio I/V1" "R19_Audio I/V2" "R20_Audio I/V1" "R20_Audio I/V2" "R24_Audio I/V1" "R24_Audio I/V2" "R25_Audio I/V1" "R25_Audio I/V2" "R27_Audio I/V1" "R27_Audio I/V2" "R34_Audio I/V1" "R34_Audio I/V2" "R36_Audio I/V1" "R36_Audio I/V2" "R37_Audio I/V1" "R37_Audio I/V2" "R55_Audio I/V1" "R55_Audio I/V2" "R56_Audio I/V1" "R56_Audio I/V2" "R57_Audio I/V1" "R57_Audio I/V2" "R60_Audio I/V1" "R60_Audio I/V2" "R61_Audio I/V1" "R61_Audio I/V2" "R63_Audio I/V1" "R63_Audio I/V2" "R65_Audio I/V1" "R65_Audio I/V2": 联系下单店铺卖家 免费帮你查找封装="联系下单店铺卖家 免费技术支持"
R39 R58 R62 R64: library part "RES 20K OHM 1% 1/16W 0402", Manufacturer=Yageo, Manufacturer Part Number=RC0402FR-0720KL, Package=0402, Supplier Part Number 1=603-RC0402FR-0720KL, Tolerance=1%, Supplier 1=Mouser
SPK+ SPK- TP2 TP3 TP4 TP5 TP6 TP7: library part TEST, "测试点", BOM名称=测试点, 联系下单店铺卖家 免费技术支持="联系下单店铺卖家 免费帮你查找封装"
SW1: "小乌龟-侧按4脚开关 带定位柱", 联系下单店铺卖家 免费技术支持="联系下单店铺卖家 免费帮你查找封装"
U1: "Micron Serial NOR Flash Memory, 2.7 to 3.6 V, 256 Mb, -40 to 85 degC, 8-Pin W-PDFN (W9), RoHS", Manufacturer="Micron Technology", Package Description="8-Pin Plastic Dual Flat No-lead Package, Body 8 x 6 mm, Pitch 1.27 mm", Package Reference=W9, Datasheet URL=https://www.micron.com/~/media/documents/products/data-sheet/nor-flash/serial-nor/mt25q/die-rev-a/mt25q_qljs_l_256_aba_0.pdf, Datasheet Version="Rev. I, 07/2017", Manufacturer Part Number=MT25QL256ABA1EW9-0SIT, Manufacturer URL=http://www.micron.com/, Mounting Technology=SurfaceMount, RoHSCompliant=true
"U2_Audio I/V1" "U2_Audio I/V2" "U16_Audio I/V1" "U16_Audio I/V2": "Double Channel Low Power Operational Amplifier, 145 MHz BW, 180 V/us SR, Industrial, 8-pin SOIC (R-8), Reel", Amplifiers Per Package=2, Generic Part Number=AD8066, Input Bias Current=2pA, Input Offset Voltage=400uV, Manufacturer="Analog Devices", Code_JEDEC=MS-012-AA, ComponentLink1Description="Manufacturer URL", ComponentLink1URL=http://www.analog.com/en/index.html, ComponentLink2Description=Datasheet, ComponentLink2URL=http://www.analog.com/static/imported-files/data_sheets/AD8065_8066.pdf, ComponentLink3Description="Package Specification", ComponentLink3URL=http://www.analog.com/static/imported-files/packages/PKG_PDF/SOIC_Narrow%20(R)/R_8.pdf, ComponentLink4Description="Reference Circuit", ComponentLink4URL=http://www.analog.com/en/all-operational-amplifiers-op-amps/operational-amplifiers-op-amps/ad8066/products/product.html#product-recommendations, DatasheetVersion="Rev. J", Iq/Amp=7.4mA, Mounting Technology="Surface Mount", PackageDescription="8-Pin Standard Small Outline Package, Body 3.9 x 4.9 mm, Pitch 1.27 mm", PackageReference=R-8, PackageVersion=060506-A, PartNumber=AD8066ARZ-R7, RevisionNote="Reference Circuit URL fixed", Slew Rate=180V/us, Small Signal Bandwidth=145MHz, V Span Max=24V, V Span Min=5V
U4: library part CMP-1348-00002-1, "Ultralow Power, Low Distortion Fully Differential ADC Driver, 3 to 7 V, -40 to 125 degC, 16-Pin LFCSP_VQ (CP-16-2), RoHS, Reel", Manufacturer="Analog Devices", Operating Range="3 to 7 V", Temperature Range="-40 to 125 degC", Test Frequency="0.05 MHz", -3db Bandwidth="260 MHz Typ.", ComponentLink1Description="Manufacturer URL", ComponentLink1URL=http://www.analog.com/en/index.html, ComponentLink2Description=Datasheet, ComponentLink2URL=http://www.analog.com/static/imported-files/data_sheets/ADA4940-1_4940-2.pdf, ComponentLink3Description="Package Specification", ComponentLink3URL=http://www.analog.com/static/imported-files/packages/PKG_PDF/LFCSP(CP)/CP_16_2.pdf, DatasheetVersion="Rev. C", Iq/Amp="1.18 mA Typ.", Mounting Technology="Surface Mount", PackageDescription="16-Pin Lead Frame Chip Scale Package, Body 3 x 3 mm, Pitch 0.5 mm", PackageVersion=Jan-05, Packing=Reel, PartNumber=ADA4940-1ACPZ-RL, RoHS=TRUE, Slew Rate="95 V/us Typ."
U5: library part CMP-0055-01263-3, "High-Speed, Closed-Loop Buffer, 5-pin SOT-23, Pb-Free", Manufacturer="Texas Instruments", Package Reference=DBV0005A, PackageTopMarking=B05A*XTT, PowerWise=N, ComponentLink1Description="Datasheet URL", ComponentLink1URL=http://www.ti.com/general/docs/lit/getliterature.tsp?genericPartNumber=LMH6559&fileType=pdf, CompType=Amplifiers, PackageDescription="Molded SOT-23, .115 x .063 x .040 in Body, 5 Lead, .0375 in Pitch", PinCount=5, RoHS=Y
U6 U19: library part CMP-04918-000430-1, "IC REG AMOLED DISPL 2OUT 12WSON", Case/Package=QFN, Max Operating Temperature=85°C, Max Supply Voltage=5V, Min Operating Temperature=-40°C, Min Supply Voltage=2.9V, Output Voltage=-5V, Package Quantity=3000, Lead Free="Lead Free", Mount="Surface Mount", Number of Channels=2, Number of Outputs=2, Number of Pins=12, Packaging="Tape and Reel", Radiation Hardening=No, RoHS Compliant=Yes
U7 "U15_Audio I/V1" "U15_Audio I/V2": library part CMP-0055-01252-3, "Single/ Dual Ultra Low Noise Wideband Operational Amplifier, 5-pin SOT-23, Pb-Free", Manufacturer="Texas Instruments", Package Reference=DBV0005A, PackageTopMarking=A94A*XTT, PowerWise=Y, ComponentLink1Description="Datasheet URL", ComponentLink1URL=http://www.ti.com/general/docs/lit/getliterature.tsp?genericPartNumber=LMH6624&fileType=pdf, CompType=Amplifiers, PackageDescription="Molded SOT-23, .115 x .063 x .040 in Body, 5 Lead, .0375 in Pitch", PinCount=5, RoHS=Y
U8: "6-axis MEMS"
U9: library part CMP-04896-000031-1, "IC COMP 4.5NS R-R HS SOT23-6", Ambient Temperature Range High=+125°C, Ambient Temperature Range Low=-40°C, Input Bias Current=0.000002uA, Input Offset Voltage=1mV, Manufacturer="Texas Instruments", Max Dual Supply Voltage=2.75V, Max Junction Temp=+150°C, Max Supply Voltage=5.5V, Min Dual Supply Voltage=1.35V, Min Supply Voltage=2.2V, Nominal Supply Current=3.2mA, Output Current per Channel=74mA, Package=DBV0006A, Temperature="-40°C to +125°C", Automotive=No, Category=IC, ComponentLink2Description=Datasheet, ComponentLink2URL=https://www.ti.com/lit/ds/symlink/tlv3501.pdf, Device Class L1="Integrated Circuits (ICs)", Device Class L2="Linear ICs", Device Class L3=Comparators, Digikey Description="IC COMP 4.5NS R-R HS SOT23-6", Height=1.45mm, Lead Free=Yes, Manufacturer Part Number=TLV3501AIDBVT, Mouser Description="Analog Comparators 4.5ns Rail-to-Rail High Speed", Number of Channels=1, Octopart=https://octopart.com/tlv3501aidbvt-texas+instruments-428399, RoHS=TRUE, Standoff Height=0mm, Temperature Range High=+125°C, Temperature Range Low=-40°C
U10: library part CMP-14351-000002-1, "IC SHIFT REGISTER 8BIT 16TSSOP", Ambient Temperature Range High=+125°C, Ambient Temperature Range Low=-40°C, Frequency=108MHz, Manufacturer=Nexperia, Max Supply Voltage=6V, Min Supply Voltage=2V, Nominal Supply Current=160uA, Package=SOT403-1, Temperature="-40°C to +125°C", Automotive=Yes, Automotive Grade="Grade 1", Category=IC, ComponentLink2Description=Datasheet, ComponentLink2URL=https://assets.nexperia.com/documents/data-sheet/74HC_HCT595_Q100.pdf, Device Class L1="Integrated Circuits (ICs)", Device Class L2="Logic ICs", Device Class L3="Shift Registers", Digikey Description="IC SHIFT REGISTER 8BIT 16TSSOP", Footprint Url=https://assets.nexperia.com/documents/outline-drawing/SOT403-1.pdf, Height=1.1mm, Ipc Land Pattern Name=SOP65P500X110-16, Lead Free=Yes, Manufacturer Part Number=74HC595PW-Q100,118, Number Of Circuits=1, Number Of Inputs=1, Number of Outputs=9, Octopart=https://octopart.com/74hc595pw-q100%2C118-nexperia-78737379, Propagation Delay=16ns, RoHS=TRUE, Standoff Height=0.05mm, Temperature Range High=+125°C, Temperature Range Low=-40°C
U10_U_SDRAM1 U10_U_SDRAM2: JLCPCB Part Class="Extended Part", Manufacturer=ISSI(美国芯成), Add into BOM=yes, Convert to PCB=yes, Datasheet=https://atta.szlcsc.com/upload/public/pdf/source/20220614/2E4F120B9DE0CAEE6B87FE9099754B7F.pdf, DEVICE=IS42S32800G-6BLI, LCSC Part Name=IS42S32800G-6BLI, Manufacturer Part=IS42S32800G-6BLI, Name=IS42S32800G-6BLI, Supplier=LCSC, Supplier Footprint=TFBGA-90(8x13), Supplier Part=C2920767, Symbol=IS42S32800G-6BLI
U11: library part CMP-0793-00127-1, "4 Ohm Ron, 8-Channel +/-15 V / +12 V / +/-5 V iCMOS Multiplexer, 16-pin SOP (RU-16), Tube", Manufacturer="Analog Devices", Bandwidth (Hz)="60M, 36M, 40M", Code_JEDEC=MO-153AB, ComponentLink1Description="Manufacturer URL", ComponentLink1URL=http://www.analog.com/en/index.html, ComponentLink2Description=Datasheet, ComponentLink2URL=http://www.analog.com/static/imported-files/data_sheets/ADG1408_1409.pdf, ComponentLink3Description="Package Specification", ComponentLink3URL=http:/www.analog.com/static/imported-files/packages/36244347913743854010197452789RU16.pdf, DatasheetVersion="Rev. B", Max Analog Signal Range="Vss to Vdd", Mounting Technology="Surface Mount", PackageDescription="16-Pin Thin Shrink Small Outline Package, Body 5 x 4.4 mm, Pitch 0.65 mm", PackageReference=RU-16, PackageVersion=Nov-02, Packing=Tube, PartNumber=ADG1408YRUZ, Ron (ohms)=4, t transition (s)=140n
U12: "WiFi & BT Module"
U13: library part CMP-12105-000055-1, "HIGH-PERFORMANCE AND DSP WITH DP", Ambient Temperature Range High=+85°C, Ambient Temperature Range Low=-40°C, Frequency=480MHz, Manufacturer=STMicroelectronics, Max Junction Temp=+125°C, Max Supply Voltage=3.6V, Min Supply Voltage=1.2V, Package=TFBGA240+25-A07U, Temperature="-40°C to +125°C", Automotive=No, Category=IC, ComponentLink2Description=Datasheet, ComponentLink2URL=https://www.st.com/resource/en/datasheet/stm32h747xi.pdf, Core Architecture="ARM Cortex-M4, ARM Cortex-M7", Data Bus Width=32bits, Device Class L1="Integrated Circuits (ICs)", Device Class L2="Embedded Processors and Controllers", Device Class L3=Microcontrollers, Digikey Description="HIGH-PERFORMANCE AND DSP WITH DP", Height=1.1mm, Interface=I2C,SPI,UART,USART,CAN,USB,LIN,IrDA,Ethernet,I2S,SMBus,Other, Ipc Land Pattern Name=BGA289N80P17X17_1400X1400X110, Lead Free=Yes, Manufacturer Part Number=STM32H747XIH6, Memory Size=2MBytes, Memory Type=FLASH, Mouser Description="STM32 Series 2 MB Flash 1 MB RAM 480 MHz 32-Bit Microcontroller - TFBGA-265", Number Of A/D Converters=3, Number Of Adc Channels=36, Number Of Cores=2, Number Of Ethernet Channels=1, Number Of I2C Channels=4, Number Of I/Os=168, Number Of Pwm Channels=2, Number Of Spi Channels=6, Number Of Timers/Counters=22, Number Of Uart Channels=9, Number Of Usb Channels=2, Octopart=https://octopart.com/stm32h747xih6-stmicroelectronics-100293943, Ram Size=1MBytes, RoHS=TRUE, Standoff Height=0.15mm, Temperature Range High=+125°C, Temperature Range Low=-40°C
U18: library part CMP-12105-000030-1, "MAINSTREAM ARM CORTEX-M4+ MCU 17", Ambient Temperature Range High=+85°C, Ambient Temperature Range Low=-40°C, Frequency=170MHz, Manufacturer=STMicroelectronics, Max Junction Temp=+105°C, Max Supply Voltage=3.6V, Min Supply Voltage=1.62V, Package=LQFP48-5B, Temperature="-40°C to +85°C", Automotive=No, Category=IC, ComponentLink2Description=Datasheet, ComponentLink2URL=https://www.st.com/resource/en/datasheet/stm32g431cb.pdf, Core Architecture="Arm Cortex-M4", Data Bus Width=32bits, Device Class L1="Integrated Circuits (ICs)", Device Class L2="Embedded Processors and Controllers", Device Class L3=Microcontrollers, Digikey Description="MAINSTREAM ARM CORTEX-M4+ MCU 17", Height=1.6mm, Interface=I2C,SPI,UART,USART,CAN,USB,LIN,IrDA,I2S, Lead Free=Yes, Manufacturer Part Number=STM32G431CBT6, Memory Size=128KBytes, Memory Type=FLASH, Number Of A/D Converters=1, Number Of Adc Channels=17, Number Of Cores=1, Number Of I2C Channels=3, Number Of I/Os=38, Number Of Pwm Channels=31, Number Of Spi Channels=3, Number Of Timers/Counters=14, Number Of Uart Channels=4, Number Of Usb Channels=1, Octopart=https://octopart.com/stm32g431cbt6-stmicroelectronics-98835224, Ram Size=32KBytes, RoHS=TRUE, Standoff Height=0.05mm, Temperature Range High=+85°C, Temperature Range Low=-40°C
U21: library part CMP-1518-00018-3, "IC PMIC BATT PWR SYST 48VQFN", Case/Package=VQFN, Max Operating Temperature=105°C, Min Operating Temperature=-40°C, Nominal Supply Current=2.5A, Operating Supply Voltage=5.8V, Output Current=1.2A, Output Voltage=3.3V, Package Quantity=2500, Lead Free="Lead Free", Max Duty Cycle=100%, Mount="Surface Mount", Number of Outputs=7, Number of Pins=48, Packaging="Tape and Reel", Radiation Hardening=No, RoHS Compliant=Yes
U22: Manufacturer=SAMSUNG(三星半导体), Add into BOM=yes, Convert to PCB=yes, Datasheet=https://atta.szlcsc.com/upload/public/pdf/source/20240221/0DCF3FBB535A67C02EC39E54F7AEA7E4.pdf, DEVICE=KLM8G1GETF-B041006_1, LCSC Part Name=KLM8G1GETF-B041006, Manufacturer Part=KLM8G1GETF-B041006, Supplier=LCSC, Supplier Footprint=FBGA-153(11.5x13), Supplier Part=C20622996, Symbol=KLM8G1GETF-B041006_C20622996
U26: library part CMP-05698-000018-1, "IC AMP CLASS D MONO 3.2W 16TQFN", Max Operating Temperature=85°C, Max Output Current=1.6A, Max Output Power=3.2W, Max Power Dissipation=1.666W, Max Supply Voltage=5.5V, Min Operating Temperature=-40°C, Min Supply Voltage=2.5V, Power Supply Rejection Ratio (PSRR)=77dB, Voltage Gain=15dB, Contact Plating=Tin, Mount="Surface Mount", Number of Pins=16, Packaging="Tape and Reel", Radiation Hardening=No, RoHS Compliant=Yes, Series=-
USBC1 USBC2: library part "USB-Tyoe-C 16P-2.0", "type-C-16pin"
X2 X4: library part XTAL-4P, "4脚无源晶振(谐振器）", BOM名称=4脚无源晶振(谐振器）, 联系下单店铺卖家 免费帮你查找封装="联系下单店铺卖家 免费技术支持"
X3: library part XTAL-2P, "2脚无源晶振(谐振器）", BOM名称=2脚无源晶振(谐振器）, 联系下单店铺卖家 免费帮你查找封装="联系下单店铺卖家 免费技术支持"
FPC1: Add into BOM=yes, Convert to PCB=yes, DEVICE=OK-06F024-04, Symbol=OK-06F024-04

## Via types
v1: diameter 16, hole 12, Top Layer to Bottom Layer, tented both sides, 1045 vias

## Nets (pads, with @x,y where several pads share a name; then routed paths per layer and width w, separated by ;. In a path a pad name is that pad's centre, name@x,y a point inside that pad or via, vN(x,y) a via of type N, cw(c..) or ccw(c..) an arc to the next point about the centre after c; other vN are vias at no path point)
+5: C28.2 C29.2 C30.2 C34.2 C35.2 C36.2 C55.2 C59.2 K1.1 K1.3 K2.1 U4.5 U4.6 U4.7 U4.8 U5.5 U6.3 U7.5 U11.2 U11.13 | length 2681.3
  Top Layer w6: U5.5@1510,723.19 1535.2,697.99 C28.2@1535.2,665.59 ; U7.5@1665,723.19 1700.2,687.99 C29.2@1700.2,665.59
  Top Layer w8: U6.3@966,662.04 v1(966,677.56)
  Top Layer w10: U11.13@1837.8,385.71 1837.8,432.8 1860,455 C30.2@1955,455 ; U11.2@1888.98,612.09 1888.98,676.98 1914,702 1993.51,702 U4.8@1996.54,698.98 2010,685.51 C59.2@2010,650 ; C35.2@1975,650 C59.2@2010,650 ; C36.2@2080,650 C34.2@2045,650 C59.2@2010,650
  Mid-Layer 4 w10: v1(966,677.56) 1012,677.56 1071,736.56 1071,789 1090,808 ; v1(1020,808) 1090,808 ; v1(1203.78,555) v1(1203.78,755) 1203.78,801.78 1210,808 ; v1(1509,722) 1601,722 ; v1(1839,421) 1839,545 ; v1(1890,658) 1892,656 1892,549 1888,545 1839,545 ; 1090,808 1210,808 ; 1210,808 1515,808 1601,722 ; 1601,722 v1(1666,722) 1718,722 1839,601 1839,545
  Bottom Layer w10: v1(1203.78,755) 1203.78,954.78 v1(1206,957)
+FB1: R52.1 U4.4 | length 78.7
  Top Layer w6: R52.1@1842.01,695 1877.47,730.47 U4.4@1905.98,730.47
-5: C39.2 C61.1 C62.1 C63.1 U5.2 U6.9 U7.2 U11.3 | length 1471.8
  Top Layer w6: U6.9@983.86,772.13 983.86,800.87 C39.2@990,807.01 ; v1(989,807) C39.2@989.99,807 ; U11.3@1863.39,612.09 1863.39,570.61 1874,560 1945,560 C63.1@1955,570
  Top Layer w10: v1(1610.39,760.59) 1592.41,760.59 1575,778 1575,813 1584.13,822.13 1612.87,822.13 1625,834.26 C61.1@1625,850
  Mid-Layer 4 w10: v1(989,807) 1015.24,833.24 1537.74,833.24 v1(1610.39,760.59) v1(1765.39,760.59) ; v1@1775,850 1775,770.2 v1(1765.39,760.59) ; v1(1865,573) 1865,660.98 v1(1765.39,760.59)
  other v1: 1775.52,848.65
-FB1: R26.1 U4.1 | length 72.5
  Top Layer w6: R26.1@1842.01,810 1862.48,789.53 U4.1@1905.98,789.53
ACD\C\_SEL: R41.1 U10.4 | length 188.9
  Top Layer w6: R41.1@2150,470 2150,481.22 2171.08,502.3 2258.73,502.3 2277.2,520.77 U10.4@2277.2,554.84
ADC-Ch1_N: R48.2 U4.11 U13.T1 | length 1161.5
  Top Layer w4: U13.T1@1274.41,1168.19 1281,1161.6 1281,1138.86 1418.46,1001.39 1472.46,1001.39 1558.86,915 1597.86,876 2097,876 2114,859 2114,779 2102.07,767.07 2092.93,767.07 v1(2080,780) 2069.84,769.84 U4.11@2028.03,769.84
ADC-Ch1_P: R53.2 U4.10 U9.1 U13.T2 | length 1435.6
  Top Layer w4: U13.T2@1274.41,1199.68 1291,1183.09 1291,1143 1422.61,1011.39 1476.61,1011.39 1573,915 1602,886 2101.14,886 2121.07,866.07 2124,863.14 2124,774.86 2121.07,771.93 2106.21,757.07 2092.07,757.07 v1(2080,745) 2074.84,750.16 U4.10@2028.03,750.16
  Bottom Layer w4: v1(2080,745) 2077,742 2077,536.58 v1(2087.4,526.18)
ADC-Ch2_N: U13.R1
ADC-Ch2_P: U13.R2
APWR_EN: U6.7 U10.7 | length 1584.2
  Top Layer w6: U6.7@1019.29,772.13 1034.87,772.13 v1(1035,772) ; v1(2348,497) 2353.98,502.98 U10.7@2353.98,554.84
  Bottom Layer w6: v1(1035,772) 1120.13,772 1412.13,480 1905,480 1986,399 2250,399 v1(2348,497)
ATTEN_1x: R38.1 U10.5 | length 176.3
  Top Layer w6: R38.1@2182.01,470 2201.15,489.14 2271.88,489.14 2302.8,520.06 U10.5@2302.8,554.84
ATTEN_20x: R59.1 U10.6 | length 170.4
  Top Layer w6: R59.1@2215,470 2280.87,470 2328.39,517.51 U10.6@2328.39,554.84
ATTEN_OUT1: R28.2 U5.1 | length 59.3
  Top Layer w8: U5.1@1610.39,723.19 1610.39,674.61 R28.2@1618,667
Audio_DAC1_N: "C20_Audio I/V1.2" "R17_Audio I/V1.1" "U2_Audio I/V1.2" U3.2 | length 762.5
  Top Layer w10: v1@112.28,321.18 112.28,281.18 156.71,281.18 156.87,281.02 ; U3.2@335.59,848.28 370.36,848.28 v1(370.53,848.11)
  Bottom Layer w6: v1(112,321) 200.54,409.54 200.54,607.21 381,787.67 381,837.64 v1(370.53,848.11)
Audio_DAC1_P: "C75_Audio I/V1.1" "R37_Audio I/V1.2" "U2_Audio I/V1.6" U3.3 | length 805.6
  Top Layer w10: 267.69,261.34 291.44,261.34 311.28,281.18 311.28,321.18 311.05,321.18 v1(310.44,321.79) ; U3.3@335.59,867.97 381.78,867.97 v1(386.09,863.66)
  Bottom Layer w6: v1(310.44,321.79) 306.21,321.79 217.14,410.86 217.14,604.01 395,781.87 395,854.75 v1(386.09,863.66)
Audio_DAC2_N: "C20_Audio I/V2.2" "R17_Audio I/V2.1" "U2_Audio I/V2.2" U3.6 | length 1394.4
  Top Layer w10: U3.6@335.59,927.04 382.59,927.04 v1(383.37,926.27) ; v1@872.28,321.18 872.28,281.18 916.71,281.18 916.87,281.02
  Bottom Layer w6: v1(383.37,926.27) 400.65,926.27 411.97,914.95 411.97,768.77 333.16,689.95 333.16,544.05 382.73,494.48 903.7,494.48 960.64,437.54 960.64,409.64 v1(872,321)
Audio_DAC2_P: "C75_Audio I/V2.1" "R37_Audio I/V2.2" "U2_Audio I/V2.6" U3.7 | length 1437.5
  Top Layer w10: U3.7@335.59,946.73 381.84,946.73 v1(383.37,948.27) ; 1027.69,261.34 1051.79,261.34 1071.49,281.04 1071.49,321.04 1070.96,321.57 v1(1070.96,321.98)
  Bottom Layer w6: v1(383.37,948.27) 401.04,948.27 426.39,922.92 426.39,761.95 348.3,683.87 348.3,551.07 388.21,511.16 912.18,511.16 980.64,442.71 980.64,407.36 1066.02,321.98 v1(1070.96,321.98)
Audio_LED: R9.1 U3.22 | length 349.9
  Top Layer w4: v1(101,861) 107.97,867.97 U3.22@146.59,867.97
  Bottom Layer w4: v1(101,861) 116,876 116,1053 v1(189,1126)